# Altium PCB PCB4.PcbDoc (part 3 of 5)
Units mm, origin at the board's own origin, x right, y up, seen from the top; angles counter-clockwise.
Board outline 240 x 180 mm, 2 copper layers (Top Layer, Bottom Layer); 259 components, 311 nets, 1128 pads, 419 vias.
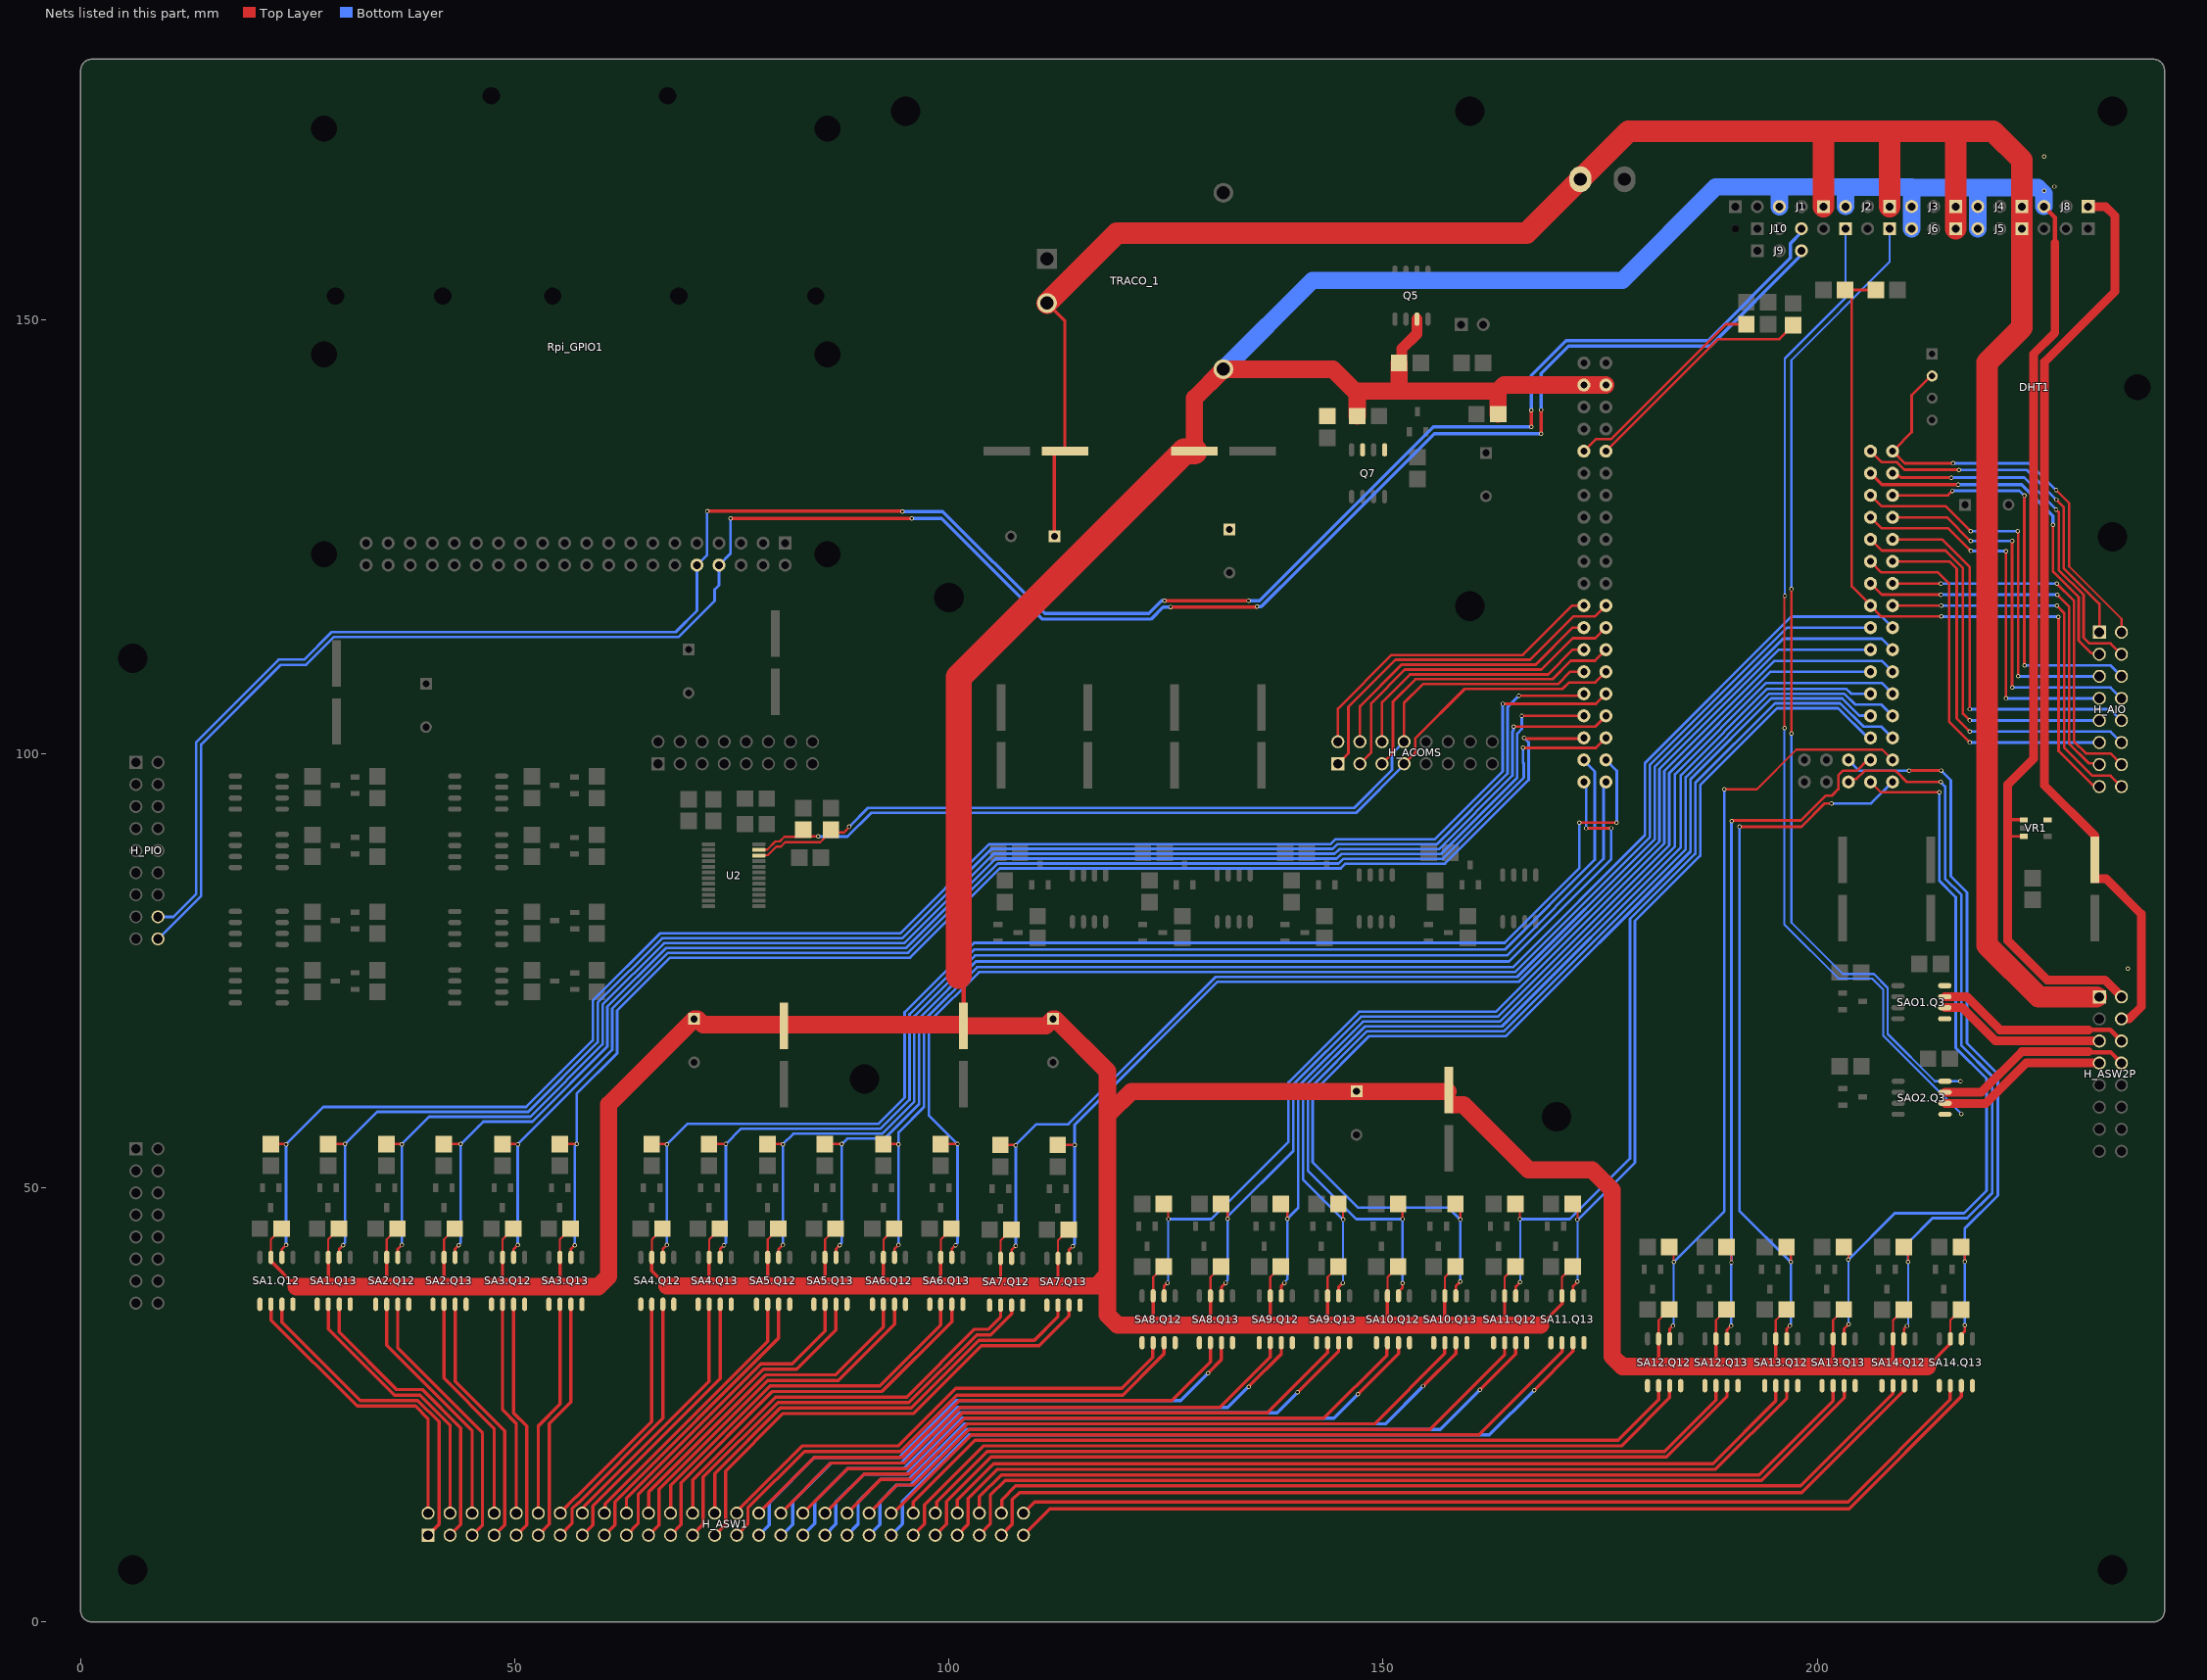
[diagram p2: the nets of this part, all layers, seen from the top]

## Via types
v1: diameter 0.5, hole 0.3, Top Layer to Bottom Layer, 387 vias
v2: diameter 0.5, hole 0.3, Top Layer to Bottom Layer, tented both sides, 24 vias
v3: diameter 1, hole 0.5, Top Layer to Bottom Layer, 8 vias

## Nets (pads, with @x,y where several pads share a name; then routed paths per layer and width w, separated by ;. In a path a pad name is that pad's centre, name@x,y a point inside that pad or via, vN(x,y) a via of type N, cw(c..) or ccw(c..) an arc to the next point about the centre after c; other vN are vias at no path point)
3.3V: C31.1 H_ASW2P.4 J8.1 VR1.5 | length 106.2
  Top Layer w1: J8.1@231.203,163.03 233.21,163.03 234.3,161.94 234.3,153.25 226.168,145.118 226.168,96.362 231.994,90.536 231.994,85.595 233.285,85.595 237.34,81.54 237.34,70.88 235.92,69.46 H_ASW2P.4@235.04,69.46
5V: C2.1 C3.1 C4.1 C5.1 C6.1 C7.1 C24.1 C25.1 H_ASW2P.2 J1.3 J2.3 J3.3 J4.3 J5.3 J6.3 J8.3 pad.VCC@1 pad.VCC@2 Q5.3 Q7.1 Q7.3 R1.2 R4.2 R16.2 R16U.2 SA1.Q12.3 SA1.Q13.3 SA1.R17.2 SA1.R18.2 SA2.Q12.3 SA2.Q13.3 SA2.R17.2 SA2.R18.2 SA3.Q12.3 SA3.Q13.3 SA3.R17.2 SA3.R18.2 SA4.Q12.3 SA4.Q13.3 SA4.R17.2 SA4.R18.2 SA5.Q12.3 SA5.Q13.3 SA5.R17.2 SA5.R18.2 SA6.Q12.3 SA6.Q13.3 SA6.R17.2 SA6.R18.2 SA7.Q12.3 SA7.Q13.3 SA7.R17.2 SA7.R18.2 SA8.Q12.3 SA8.Q13.3 SA8.R17.2 SA8.R18.2 SA9.Q12.3 SA9.Q13.3 SA9.R17.2 SA9.R18.2 SA10.Q12.3 SA10.Q13.3 SA10.R17.2 SA10.R18.2 SA11.Q12.3 SA11.Q13.3 SA11.R17.2 SA11.R18.2 SA12.Q12.3 SA12.Q13.3 SA12.R17.2 SA12.R18.2 SA13.Q12.3 SA13.Q13.3 SA13.R17.2 SA13.R18.2 SA14.Q12.3 SA14.Q13.3 SA14.R17.2 SA14.R18.2 TRACO_1.4 VR1.1 VR1.3 | length 948.6
  Top Layer w0.254: SA1.Q12.3@21.903,41.999 21.903,44.069 SA1.R17.2@23.133,45.299 ; SA1.Q13.3@28.507,41.999 28.507,44.069 SA1.R18.2@29.737,45.299 ; SA2.Q12.3@35.245,41.998 35.245,44.068 SA2.R17.2@36.475,45.298 ; SA2.Q13.3@41.849,41.998 41.849,44.068 SA2.R18.2@43.079,45.298 ; SA3.Q12.3@48.587,41.998 48.587,44.068 SA3.R17.2@49.817,45.298 ; SA3.Q13.3@55.191,41.998 55.191,44.068 SA3.R18.2@56.421,45.298 ; SA4.Q12.3@65.775,41.998 65.775,44.068 SA4.R17.2@67.005,45.298 ; SA4.Q13.3@72.379,41.998 72.379,44.068 SA4.R18.2@73.609,45.298 ; SA5.Q12.3@79.115,41.998 79.115,44.068 SA5.R17.2@80.345,45.298 ; SA5.Q13.3@85.719,41.998 85.719,44.068 SA5.R18.2@86.949,45.298 ; SA6.Q12.3@92.457,41.998 92.457,44.068 SA6.R17.2@93.687,45.298 ; SA6.Q13.3@99.061,41.998 99.061,44.068 SA6.R18.2@100.291,45.298 ; SA7.Q12.3@105.947,41.893 105.947,43.963 SA7.R17.2@107.177,45.193 ; SA7.Q13.3@112.55,41.893 112.55,43.963 SA7.R18.2@113.78,45.193 ; SA8.Q12.3@123.513,37.567 123.513,39.708 SA8.R17.2@124.743,40.938 ; SA8.Q13.3@130.116,37.567 130.116,39.708 SA8.R18.2@131.346,40.938 ; SA9.Q12.3@137.009,37.567 137.009,39.708 SA9.R17.2@138.239,40.938 ; SA9.Q13.3@143.612,37.567 143.612,39.708 SA9.R18.2@144.842,40.938 ; SA10.Q12.3@150.507,37.567 150.507,39.708 SA10.R17.2@151.737,40.938 ; SA10.Q13.3@157.11,37.567 157.11,39.708 SA10.R18.2@158.34,40.938 ; SA11.Q12.3@164.007,37.566 164.007,39.707 SA11.R17.2@165.237,40.937 ; SA11.Q13.3@170.61,37.566 170.61,39.707 SA11.R18.2@171.84,40.937 ; SA12.Q12.3@181.734,32.617 181.734,34.758 SA12.R17.2@182.964,35.988 ; SA12.Q13.3@188.337,32.617 188.337,34.758 SA12.R18.2@189.567,35.988 ; SA13.Q12.3@195.232,32.617 195.232,34.758 SA13.R17.2@196.462,35.988 ; SA13.Q13.3@201.835,32.617 201.835,34.758 SA13.R18.2@203.065,35.988 ; SA14.Q12.3@208.73,32.615 208.73,34.757 SA14.R17.2@209.96,35.987 ; SA14.Q13.3@215.333,32.615 215.333,34.757 SA14.R18.2@216.563,35.987
  Top Layer w0.305: 221.93,90.47 221.95,90.49 VR1.3@223.795,90.49
  Top Layer w0.381: SA1.Q12.3@21.903,41.999 21.903,41.553 24.829,38.628 ; 28.487,38.628 28.507,38.648 SA1.Q13.3@28.507,41.999 ; 35.179,38.627 35.245,38.694 SA2.Q12.3@35.245,41.998 ; 41.829,38.627 41.849,38.647 SA2.Q13.3@41.849,41.998 ; 48.567,38.627 48.587,38.647 SA3.Q12.3@48.587,41.998 ; 55.171,38.627 55.191,38.647 SA3.Q13.3@55.191,41.998 ; SA4.Q12.3@65.775,41.998 65.775,40.433 67.516,38.693 ; 72.379,38.693 SA4.Q13.3@72.379,41.998 ; 79.115,38.693 SA5.Q12.3@79.115,41.998 ; 85.719,38.693 SA5.Q13.3@85.719,41.998 ; 92.457,38.693 SA6.Q12.3@92.457,41.998 ; 99.061,38.693 SA6.Q13.3@99.061,41.998 ; 105.947,38.693 SA7.Q12.3@105.947,41.893 ; 112.55,38.693 SA7.Q13.3@112.55,41.893 ; 123.513,34.196 SA8.Q12.3@123.513,37.567 ; 130.116,34.196 SA8.Q13.3@130.116,37.567 ; 137.009,34.196 SA9.Q12.3@137.009,37.567 ; 143.612,34.196 SA9.Q13.3@143.612,37.567 ; 150.507,34.196 SA10.Q12.3@150.507,37.567 ; 157.11,34.196 SA10.Q13.3@157.11,37.567 ; 164.007,34.196 SA11.Q12.3@164.007,37.566 ; 168.145,34.196 170.61,36.661 SA11.Q13.3@170.61,37.566 ; 181.734,29.415 SA12.Q12.3@181.734,32.617 ; 188.337,29.415 SA12.Q13.3@188.337,32.617 ; 195.232,29.415 SA13.Q12.3@195.232,32.617 ; 201.835,29.415 SA13.Q13.3@201.835,32.617 ; 208.73,29.415 SA14.Q12.3@208.73,32.615 ; 212.689,29.415 215.333,32.06 SA14.Q13.3@215.333,32.615 ; 221.93,92.39 VR1.1@223.795,92.39
  Top Layer w0.5: J8.3@226.123,163.03 227.382,161.771 227.382,158.862
  Top Layer w0.508: 101.116,74.445 101.684,73.878 C5.1@101.684,68.662
  Top Layer w0.635: C3.1@157.446,61.11 C3.1@157.586,61.25
  Top Layer w1: 227.382,158.862 227.382,148.502 224.914,146.034 224.914,99.414 221.93,96.43 221.93,92.39 221.93,90.47 221.93,78.512 226.489,73.953 233.127,73.953 235.034,72.045 H_ASW2P.2@235.034,72
  Top Layer w1.27: R16U.2@151.854,145.01 152.169,145.325 152.169,146.644 153.901,148.376 Q5.3@153.901,150.066
  Top Layer w2: 24.829,38.628 28.487,38.628 31.69,38.628 ; 31.691,38.627 35.179,38.627 41.829,38.627 48.567,38.627 55.171,38.627 59.623,38.627 60.794,39.799 60.794,59.594 C6.1@70.654,69.454 71.049,69.454 71.714,68.789 C7.1@80.487,68.789 ; 67.516,38.693 72.379,38.693 79.115,38.693 85.719,38.693 92.457,38.693 99.061,38.693 105.947,38.693 112.55,38.693 116.979,38.693 118.256,39.97 ; C7.1@80.987,68.662 81.114,68.789 101.557,68.789 C5.1@101.684,68.662 111.186,68.662 111.971,69.448 C4.1@111.971,69.454 112.234,69.454 118.256,63.432 118.256,58.557 ; C25.1@128.264,134.848 128.264,140.94 TRACO_1.4@131.614,144.29 144.236,144.29 147.03,141.496 ; R16.2@147.03,138.897 147.03,141.778 151.772,141.778 ; R16U.2@151.854,145.01 151.854,141.86 151.772,141.778 ; C3.1@157.446,61.11 C2.1@146.942,61.11 121.011,61.11 118.457,58.557 118.256,58.557 ; C3.1@158.086,59.575 159.261,59.575 166.772,52.064 174.076,52.064 176.384,49.756 176.384,30.587 177.556,29.415 181.734,29.415 188.337,29.415 195.232,29.415 201.835,29.415 208.73,29.415 212.689,29.415 ; R1.2@163.25,139.11 163.25,141.778 ; 168.145,34.196 164.007,34.196 157.11,34.196 150.507,34.196 143.612,34.196 137.009,34.196 130.116,34.196 123.513,34.196 119.428,34.196 118.256,35.368 118.256,39.97 ; 175.666,142.47 163.942,142.47 163.25,141.778 ; 118.256,39.97 118.256,58.557 ; 151.772,141.778 160.996,141.778 163.25,141.778
  Top Layer w3: 101.116,74.445 101.116,108.816 127.148,134.848 C25.1@128.264,134.848
  Bottom Layer w2: TRACO_1.4@131.614,144.29 141.854,154.53 177.556,154.53 188.31,165.284 195.643,165.284 ; J1.3@195.643,163.02 195.643,165.284 ; J2.3@203.263,163.03 203.263,165.247 ; 203.263,165.259 210.883,165.259 210.883,165.22 ; 203.263,165.284 195.643,165.284 ; J6.3@210.883,160.48 J3.3@210.883,163.03 210.883,165.22 ; J5.3@218.503,160.48 J4.3@218.503,163.03 218.503,165.22 ; J8.3@226.123,163.03 226.123,164.517 225.42,165.22 218.503,165.22 ; 210.883,165.22 218.503,165.22
  other v1: 235.79,75.25 226.14,164.85 227.33,165.32 226.151,168.797
5V12V_HS_1: H_ASW2P.5 SAO1.Q3.5 SAO1.Q3.6 | length 19.4
  Top Layer w1: SAO1.Q3.6@214.7,70.753 214.716,70.769 216.698,70.769 220.523,66.944 232.476,66.944 H_ASW2P.5@232.5,66.92
5V12V_HS_2: H_ASW2P.7 J11.1 SAO2.Q3.5 SAO2.Q3.6 | length 135.2
  Top Layer w0.254: v1(196.225,102.962) 196.225,118.129 v1(196.268,118.172)
  Top Layer w1: SAO2.Q3.6@214.776,59.727 219.422,59.727 224.075,64.38 H_ASW2P.7@232.5,64.38
  Bottom Layer w0.254: v1(196.225,102.962) 196.225,80.333 202.442,74.117 206.315,74.117 207.605,72.827 207.605,67.521 v1(216.597,58.529) ; v1(196.268,118.172) 196.268,145.51 203.263,152.506 J11.1@203.263,160.48
5V12V_LS_1: H_ASW2P.6 SAO1.Q3.7 SAO1.Q3.8 | length 22.5
  Top Layer w0.5: 231.23,68.198 233.762,68.198 H_ASW2P.6@235.04,66.92
  Top Layer w1: SAO1.Q3.7@214.7,72.023 217.217,72.023 221.042,68.198 231.23,68.198
5V12V_LS_2: H_ASW2P.8 J12.1 SAO2.Q3.7 SAO2.Q3.8 | length 137.6
  Top Layer w0.254: v1(197.024,102.319) v1(197.024,118.96)
  Top Layer w0.5: 231.23,65.69 231.286,65.634 233.786,65.634 H_ASW2P.8@235.04,64.38
  Top Layer w1: SAO2.Q3.7@214.714,60.998 218.884,60.998 223.575,65.69 231.23,65.69
  Bottom Layer w0.254: v1(197.024,102.319) 197.024,80.561 202.96,74.625 206.526,74.625 208.113,73.038 208.113,67.731 213.558,62.286 v1(216.517,62.286) ; v1(197.024,118.96) 197.024,145.332 208.343,156.652 J12.1@208.343,160.48
5V_HS_1: H_ASW1.2 SA1.Q12.5 SA1.Q12.6 | length 35.5
  Top Layer w0.381: SA1.Q12.6@21.903,36.599 21.938,36.564 21.938,34.767 31.837,24.868 38.556,24.868 40,23.424 H_ASW1.2@40,12.54
5V_HS_2: H_ASW1.4 SA1.Q13.5 SA1.Q13.6 | length 31.6
  Top Layer w0.381: SA1.Q13.6@28.507,36.599 28.516,36.589 28.516,33.746 36.124,26.138 39.082,26.138 42.54,22.68 H_ASW1.4@42.54,12.54
5V_HS_3: H_ASW1.6 SA2.Q12.5 SA2.Q12.6 | length 28.1
  Top Layer w0.381: SA2.Q12.6@35.245,36.598 35.245,31.882 45.08,22.048 H_ASW1.6@45.08,12.54
5V_HS_4: H_ASW1.8 SA2.Q13.5 SA2.Q13.6 | length 26.4
  Top Layer w0.381: SA2.Q13.6@41.849,36.598 41.849,28.081 47.62,22.31 H_ASW1.8@47.62,12.54
5V_HS_5: H_ASW1.10 SA3.Q12.5 SA3.Q12.6 | length 24.7
  Top Layer w0.381: SA3.Q12.6@48.587,36.598 48.587,24.438 50.16,22.865 H_ASW1.10@50.16,12.54
5V_HS_6: H_ASW1.12 SA3.Q13.5 SA3.Q13.6 | length 25.1
  Top Layer w0.381: H_ASW1.12@52.7,12.54 52.7,22.595 55.191,25.086 SA3.Q13.6@55.191,36.598
5V_HS_7: H_ASW1.14 SA4.Q12.5 SA4.Q12.6 | length 28.4
  Top Layer w0.381: H_ASW1.14@55.24,12.54 55.24,12.587 57.022,14.369 57.069,14.369 65.775,23.075 SA4.Q12.6@65.775,36.598
5V_HS_8: H_ASW1.16 SA4.Q13.5 SA4.Q13.6 | length 30.1
  Top Layer w0.381: H_ASW1.16@57.78,12.54 57.994,12.754 57.994,13.298 72.379,27.683 SA4.Q13.6@72.379,36.598
5V_HS_9: H_ASW1.18 SA5.Q12.5 SA5.Q12.6 | length 31.8
  Top Layer w0.381: H_ASW1.18@60.32,12.54 60.38,12.6 60.38,13.587 79.115,32.323 SA5.Q12.6@79.115,36.598
5V_HS_10: H_ASW1.20 SA5.Q13.5 SA5.Q13.6 | length 35.7
  Top Layer w0.381: H_ASW1.20@62.86,12.54 62.86,14.271 78.318,29.729 81.943,29.729 85.719,33.505 SA5.Q13.6@85.719,36.598
5V_HS_11: H_ASW1.22 SA6.Q12.5 SA6.Q12.6 | length 40
  Top Layer w0.381: H_ASW1.22@65.4,12.54 65.4,14.984 78.875,28.459 86.933,28.459 92.457,33.983 SA6.Q12.6@92.457,36.598
5V_HS_12: H_ASW1.24 SA6.Q13.5 SA6.Q13.6 | length 44.4
  Top Layer w0.381: H_ASW1.24@67.94,12.54 67.94,15.728 79.401,27.189 92.037,27.189 99.061,34.213 SA6.Q13.6@99.061,36.598
5V_HS_13: H_ASW1.26 SA7.Q12.5 SA7.Q12.6 | length 48.4
  Top Layer w0.381: H_ASW1.26@70.48,12.54 70.48,16.359 80.04,25.919 95.134,25.919 102.929,33.714 104.545,33.714 105.947,35.116 SA7.Q12.6@105.947,36.493
5V_HS_14: H_ASW1.28 SA7.Q13.5 SA7.Q13.6 | length 52.9
  Top Layer w0.381: H_ASW1.28@73.02,12.54 73.02,17.103 80.566,24.649 95.66,24.649 103.455,32.444 109.847,32.444 112.55,35.147 SA7.Q13.6@112.55,36.493
5V_HS_15: H_ASW1.30 SA8.Q12.5 SA8.Q12.6 | length 57.2
  Top Layer w0.381: H_ASW1.30@75.56,12.54 75.56,12.759 83.081,20.28 94.149,20.28 100.771,26.902 119.896,26.902 123.471,30.477 123.471,32.125 SA8.Q12.6@123.513,32.167
5V_HS_16: H_ASW1.32 SA8.Q13.5 SA8.Q13.6 | length 61.4
  Top Layer w0.305: H_ASW1.32@78.07,12.57 H_ASW1.32@78.1,12.54
  Top Layer w0.381: H_ASW1.32@78.13,12.57 84.51,18.95 94.615,18.95 101.171,25.506 125.646,25.506 130.116,29.976 SA8.Q13.6@130.116,32.167
5V_HS_17: H_ASW1.34 SA9.Q12.5 SA9.Q12.6 | length 65.5
  Top Layer w0.381: H_ASW1.34@80.64,12.54 86.415,18.315 94.878,18.315 101.288,24.725 131.191,24.725 137.009,30.543 SA9.Q12.6@137.009,32.167
5V_HS_18: H_ASW1.36 SA9.Q13.5 SA9.Q13.6 | length 69.2
  Top Layer w0.381: H_ASW1.36@83.18,12.54 88.32,17.68 95.141,17.68 101.551,24.09 136.675,24.09 143.612,31.027 SA9.Q13.6@143.612,32.167
5V_HS_19: H_ASW1.38 SA10.Q12.5 SA10.Q12.6 | length 73.7
  Top Layer w0.381: H_ASW1.38@85.72,12.54 90.225,17.045 95.405,17.045 101.814,23.455 143.182,23.455 150.435,30.708 150.435,31.466 150.465,31.495 150.465,32.125 SA10.Q12.6@150.507,32.167
5V_HS_20: H_ASW1.40 SA10.Q13.5 SA10.Q13.6 | length 77.7
  Top Layer w0.381: H_ASW1.40@88.26,12.54 92.13,16.41 95.668,16.41 102.077,22.82 142.533,22.82 149.036,22.82 157.11,30.894 SA10.Q13.6@157.11,32.167
5V_HS_21: H_ASW1.42 SA11.Q12.5 SA11.Q12.6 | length 82.1
  Top Layer w0.381: H_ASW1.42@90.8,12.54 94.035,15.775 95.931,15.775 102.34,22.185 142.796,22.185 155.407,22.185 164.007,30.785 SA11.Q12.6@164.007,32.166
5V_HS_22: H_ASW1.44 SA11.Q13.5 SA11.Q13.6 | length 86
  Top Layer w0.381: H_ASW1.44@93.34,12.54 93.593,12.54 102.603,21.55 143.059,21.55 161.026,21.55 170.61,31.134 SA11.Q13.6@170.61,32.166
5V_HS_23: H_ASW1.46 SA12.Q12.5 SA12.Q12.6 | length 93.6
  Top Layer w0.381: H_ASW1.46@95.88,12.54 95.88,13.817 102.978,20.915 177.047,20.915 181.734,25.602 SA12.Q12.6@181.734,27.217
5V_HS_24: H_ASW1.48 SA12.Q13.5 SA12.Q13.6 | length 97.6
  Top Layer w0.381: H_ASW1.48@98.42,12.54 98.61,12.73 98.61,13.848 104.407,19.645 182.403,19.645 188.337,25.579 SA12.Q13.6@188.337,27.217
5V_HS_25: H_ASW1.50 SA13.Q12.5 SA13.Q12.6 | length 102.3
  Top Layer w0.381: H_ASW1.50@100.96,12.54 100.969,12.549 100.969,14.052 105.151,18.234 187.99,18.234 195.232,25.476 SA13.Q12.6@195.232,27.217
5V_HS_26: H_ASW1.52 SA13.Q13.5 SA13.Q13.6 | length 106.7
  Top Layer w0.381: H_ASW1.52@103.5,12.54 103.5,14.428 106.021,16.949 193.311,16.949 201.832,25.47 201.832,27.214 SA13.Q13.6@201.835,27.217
  Bottom Layer w0.305: H_ASW1.52@103.5,12.54 H_ASW1.52@103.5,12.73
5V_HS_27: H_ASW1.54 SA14.Q12.5 SA14.Q12.6 | length 110.2
  Top Layer w0.381: H_ASW1.54@106.04,12.54 106.082,12.582 106.082,14.068 107.692,15.679 198.106,15.679 208.713,26.287 208.713,27.198 SA14.Q12.6@208.73,27.215
5V_HS_28: H_ASW1.56 SA14.Q13.5 SA14.Q13.6 | length 113.8
  Top Layer w0.381: H_ASW1.56@108.58,12.54 109.884,13.844 203.568,13.844 215.316,25.592 215.316,27.198 SA14.Q13.6@215.333,27.215
5V_LS_1: H_ASW1.1 SA1.Q12.7 SA1.Q12.8 | length 38.5
  Top Layer w0.381: SA1.Q12.7@23.173,36.599 23.173,34.537 32.207,25.503 38.819,25.503 41.258,23.064 41.258,11.258 H_ASW1.1@40,10
5V_LS_2: H_ASW1.3 SA1.Q13.7 SA1.Q13.8 | length 34.6
  Top Layer w0.381: SA1.Q13.7@29.777,36.599 29.777,33.383 36.387,26.773 39.345,26.773 43.77,22.348 43.77,11.23 H_ASW1.3@42.54,10
5V_LS_3: H_ASW1.5 SA2.Q12.7 SA2.Q12.8 | length 31.1
  Top Layer w0.381: SA2.Q12.7@36.515,36.598 36.515,31.516 46.274,21.757 46.274,11.194 H_ASW1.5@45.08,10
5V_LS_4: H_ASW1.7 SA2.Q13.7 SA2.Q13.8 | length 29.5
  Top Layer w0.381: SA2.Q13.7@43.119,36.598 43.119,27.709 48.814,22.013 48.814,11.194 H_ASW1.7@47.62,10
5V_LS_5: H_ASW1.9 SA3.Q12.7 SA3.Q12.8 | length 27.7
  Top Layer w0.381: SA3.Q12.7@49.857,36.598 49.857,24.066 51.354,22.569 51.354,11.194 H_ASW1.9@50.16,10
5V_LS_6: H_ASW1.11 SA3.Q13.7 SA3.Q13.8 | length 28.2
  Top Layer w0.381: H_ASW1.11@52.7,10 53.962,11.262 53.962,22.836 56.461,25.335 SA3.Q13.7@56.461,36.598
5V_LS_7: H_ASW1.13 SA4.Q12.7 SA4.Q12.8 | length 31.5
  Top Layer w0.381: H_ASW1.13@55.24,10 56.585,11.345 56.585,13.035 57.285,13.734 57.333,13.734 67.045,23.447 SA4.Q12.7@67.045,36.598
5V_LS_8: H_ASW1.15 SA4.Q13.7 SA4.Q13.8 | length 33.2
  Top Layer w0.381: H_ASW1.15@57.78,10 58.974,11.194 58.974,13.38 73.649,28.055 SA4.Q13.7@73.649,36.598
5V_LS_9: H_ASW1.17 SA5.Q12.7 SA5.Q12.8 | length 34.9
  Top Layer w0.381: H_ASW1.17@60.32,10 61.514,11.194 61.514,13.824 80.385,32.695 SA5.Q12.7@80.385,36.598
5V_LS_10: H_ASW1.19 SA5.Q13.7 SA5.Q13.8 | length 38.8
  Top Layer w0.381: H_ASW1.19@62.86,10 64.205,11.345 64.205,14.687 78.612,29.094 82.44,29.094 86.989,33.643 SA5.Q13.7@86.989,36.598
5V_LS_11: H_ASW1.21 SA6.Q12.7 SA6.Q12.8 | length 43.1
  Top Layer w0.381: H_ASW1.21@65.4,10 66.594,11.194 66.594,15.28 79.138,27.824 87.248,27.824 93.727,34.303 SA6.Q12.7@93.727,36.598
5V_LS_12: H_ASW1.23 SA6.Q13.7 SA6.Q13.8 | length 47.4
  Top Layer w0.381: H_ASW1.23@67.94,10 69.16,11.22 69.16,16.05 79.664,26.554 92.3,26.554 100.331,34.585 SA6.Q13.7@100.331,36.598
5V_LS_13: H_ASW1.25 SA7.Q12.7 SA7.Q12.8 | length 51.5
  Top Layer w0.381: H_ASW1.25@70.48,10 70.48,10.038 71.701,11.259 71.701,16.683 80.303,25.284 95.397,25.284 103.192,33.079 104.808,33.079 107.217,35.488 SA7.Q12.7@107.217,36.493
5V_LS_14: H_ASW1.27 SA7.Q13.7 SA7.Q13.8 | length 56.1
  Top Layer w0.381: H_ASW1.27@73.02,10 74.262,11.242 74.262,17.383 80.893,24.014 95.923,24.014 103.718,31.809 110.375,31.809 113.82,35.254 SA7.Q13.7@113.82,36.493
5V_LS_15: H_ASW1.29 SA8.Q12.7 SA8.Q12.8 | length 60.2
  Top Layer w0.381: H_ASW1.29@75.56,10 76.842,11.282 76.842,13.143 83.344,19.645 94.412,19.645 100.908,26.141 120.033,26.141 124.106,30.214 124.783,30.891 SA8.Q12.7@124.783,32.167
5V_LS_16: H_ASW1.31 SA8.Q13.7 SA8.Q13.8 | length 65.1
  Top Layer w0.381: v1(129.849,28.678) 131.386,30.215 SA8.Q13.7@131.386,32.167
  Bottom Layer w0.381: H_ASW1.31@78.1,10 79.294,11.194 79.294,13.734 84.506,18.946 94.296,18.946 100.856,25.506 126.677,25.506 v1(129.849,28.678)
5V_LS_17: H_ASW1.33 SA9.Q12.7 SA9.Q12.8 | length 69.2
  Top Layer w0.381: v1(134.544,27.096) 134.544,27.146 138.279,30.881 SA9.Q12.7@138.279,32.167
  Bottom Layer w0.381: H_ASW1.33@80.64,10 80.77,10 81.985,11.215 81.985,13.885 86.411,18.311 94.559,18.311 100.973,24.725 132.123,24.725 134.477,27.079 134.527,27.079 v1(134.544,27.096)
5V_LS_18: H_ASW1.35 SA9.Q13.7 SA9.Q13.8 | length 72.9
  Top Layer w0.381: v1(140.144,26.454) 144.882,31.192 SA9.Q13.7@144.882,32.167
  Bottom Layer w0.381: H_ASW1.35@83.18,10 84.525,11.345 84.525,13.885 88.316,17.676 94.83,17.676 101.244,24.09 137.78,24.09 v1(140.144,26.454)
5V_LS_19: H_ASW1.37 SA10.Q12.7 SA10.Q12.8 | length 77.5
  Top Layer w0.381: v1(147.121,26.245) 151.777,30.901 SA10.Q12.7@151.777,32.167
  Bottom Layer w0.381: H_ASW1.37@85.72,10 86.989,11.269 86.989,13.809 90.221,17.041 95.093,17.041 101.507,23.455 101.599,23.455 144.331,23.455 v1(147.121,26.245)
5V_LS_20: H_ASW1.39 SA10.Q13.7 SA10.Q13.8 | length 81.5
  Top Layer w0.381: v1(154.609,27.167) 158.38,30.938 SA10.Q13.7@158.38,32.167
  Bottom Layer w0.381: H_ASW1.39@88.26,10 89.536,11.276 89.536,13.816 92.126,16.406 95.356,16.406 101.77,22.82 101.862,22.82 150.262,22.82 v1(154.609,27.167)
5V_LS_21: H_ASW1.41 SA11.Q12.7 SA11.Q12.8 | length 85.9
  Top Layer w0.381: v1(161.166,26.742) 165.277,30.853 SA11.Q12.7@165.277,32.166
  Bottom Layer w0.381: H_ASW1.41@90.8,10 92.048,11.248 92.048,13.834 93.985,15.771 95.619,15.771 102.033,22.185 156.609,22.185 v1(161.166,26.742)
5V_LS_22: H_ASW1.43 SA11.Q13.7 SA11.Q13.8 | length 89.8
  Top Layer w0.381: v1(167.397,26.706) 171.88,31.189 SA11.Q13.7@171.88,32.166
  Bottom Layer w0.381: H_ASW1.43@93.34,10 94.652,11.312 94.652,13.906 102.296,21.55 162.241,21.55 v1(167.397,26.706)
5V_LS_23: H_ASW1.45 SA12.Q12.7 SA12.Q12.8 | length 96.3
  Top Layer w0.381: H_ASW1.45@95.88,10 97.162,11.282 97.162,13.478 102.517,18.833 103.964,20.28 177.437,20.28 183.004,25.847 SA12.Q12.7@183.004,27.217
5V_LS_24: H_ASW1.47 SA12.Q13.7 SA12.Q13.8 | length 100.6
  Top Layer w0.381: H_ASW1.47@98.42,10 99.702,11.282 99.702,13.863 104.843,19.004 182.66,19.004 189.607,25.951 SA12.Q13.7@189.607,27.217
5V_LS_25: H_ASW1.49 SA13.Q12.7 SA13.Q12.8 | length 105.2
  Top Layer w0.381: H_ASW1.49@100.96,10 102.218,11.258 102.218,14.223 105.579,17.584 188.3,17.584 196.502,25.786 SA13.Q12.7@196.502,27.217
5V_LS_26: H_ASW1.51 SA13.Q13.7 SA13.Q13.8 | length 109.5
  Top Layer w0.381: H_ASW1.51@103.5,10 104.766,11.266 104.766,14.616 106.464,16.314 193.574,16.314 203.105,25.845 SA13.Q13.7@203.105,27.217
5V_LS_27: H_ASW1.53 SA14.Q12.7 SA14.Q12.8 | length 113.1
  Top Layer w0.381: H_ASW1.53@106.04,10 107.298,11.258 107.298,14.112 108.103,14.917 198.242,14.917 209.891,26.566 209.891,26.572 210,26.681 SA14.Q12.7@210,27.215
5V_LS_28: H_ASW1.55 SA14.Q13.7 SA14.Q13.8 | length 115.9
  Top Layer w0.381: H_ASW1.55@108.58,10 111.627,13.047 203.669,13.047 216.603,25.981 SA14.Q13.7@216.603,27.215
5V_SW1: pad.D22 SA1.Q12.2 SA1.R12.1 | length 195.9
  Top Layer w0.305: SA1.R12.1@21.781,55.049 SA1.R12.1@21.883,55.049 23.621,55.049 v1(23.652,55.017) ; SA1.Q12.2@23.173,41.999 23.173,42.944 v1(23.652,43.423) ; v1(163.79,105.754) 174.51,105.754 pad.D22@175.666,106.91
  Bottom Layer w0.305: v1(23.652,43.423) v1(23.652,55.017) 27.95,59.315 51.311,59.315 58.984,66.987 58.984,71.573 66.716,79.306 94.369,79.306 104.664,89.601 143.961,89.601 144.498,90.137 155.959,90.137 163.778,97.957 v1@163.778,105.832
5V_SW2: pad.D23 SA1.Q13.2 SA1.R11.1 | length 186.6
  Top Layer w0.305: SA1.R11.1@28.487,55.049 v1(30.433,55.049) ; SA1.Q13.2@29.777,41.999 29.777,42.965 v1(30.209,43.397) ; v1(165.636,106.681) 172.897,106.681 pad.D23@173.126,106.91
  Bottom Layer w0.305: v1(30.209,43.397) 30.209,43.449 30.433,43.673 v1(30.433,55.049) 34.14,58.756 51.543,58.756 59.543,66.756 59.543,71.342 66.948,78.747 94.615,78.747 104.91,89.042 144.193,89.042 144.729,89.578 156.19,89.578 164.337,97.725 164.337,105.383 v1(165.636,106.681)
5V_SW3: pad.D24 SA2.Q12.2 SA2.R12.1 | length 180.1
  Top Layer w0.305: SA2.R12.1@35.123,55.048 SA2.R12.1@35.225,55.048 36.963,55.048 v1(36.994,55.017) ; SA2.Q12.2@36.515,41.998 36.515,42.943 v1(36.994,43.422) ; v1(165.061,103.116) 174.412,103.116 pad.D24@175.666,104.37
  Bottom Layer w0.305: v1@36.963,55.048 40.112,58.197 51.774,58.197 60.101,66.524 60.101,71.11 67.179,78.188 94.846,78.188 105.141,88.484 144.424,88.484 144.96,89.02 156.422,89.02 164.896,97.494 164.896,102.564 165.024,102.692 165.024,103.079 v1(165.061,103.116) ; v1(36.994,43.422) v1(36.994,55.017)
5V_SW4: pad.D25 SA2.Q13.2 SA2.R11.1 | length 171.6
  Top Layer w0.305: SA2.R11.1@41.829,55.048 v1(43.775,55.048) ; SA2.Q13.2@43.119,41.998 43.119,42.965 v1(43.551,43.397) ; v1(165.977,104.37) pad.D25@173.126,104.37
  Bottom Layer w0.305: v1(43.551,43.397) 43.551,43.449 43.775,43.673 v1(43.775,55.048) 45.806,57.08 46.365,57.638 52.006,57.638 60.66,66.293 60.66,70.879 67.411,77.63 95.078,77.63 105.373,87.925 144.656,87.925 145.192,88.461 156.653,88.461 165.455,97.262 165.455,102.332 165.977,102.854 v1(165.977,104.37)
5V_SW5: pad.D26 SA3.Q12.2 SA3.R12.1 | length 164.8
  Top Layer w0.305: SA3.R12.1@48.465,55.048 SA3.R12.1@48.567,55.048 50.305,55.048 v1(50.336,55.017) ; SA3.Q12.2@49.857,41.998 49.857,42.943 v1(50.336,43.422) ; v1(166.111,100.7) 166.214,100.7 166.24,100.674 174.51,100.674 pad.D26@175.666,101.83
  Bottom Layer w0.305: v1(50.336,43.422) v1(50.336,55.017) 61.219,65.9 61.219,70.647 67.642,77.071 95.309,77.071 105.604,87.366 144.887,87.366 145.423,87.902 156.885,87.902 166.209,97.226 166.209,98.888 166.111,98.986 v1(166.111,100.7)
5V_SW6: pad.D27 SA3.Q13.2 SA3.R11.1 | length 160.5
  Top Layer w0.305: SA3.R11.1@55.171,55.048 v1(57.117,55.048) ; SA3.Q13.2@56.461,41.998 56.461,42.965 v1(56.893,43.397) ; v1(166.254,101.83) 166.307,101.83 166.381,101.756 173.052,101.756 pad.D27@173.126,101.83
  Bottom Layer w0.305: v1(56.893,43.397) 56.893,54.771 57.117,54.995 v1(57.117,55.048) 57.117,60.839 61.778,65.5 61.778,70.416 67.874,76.512 95.541,76.512 105.836,86.807 145.119,86.807 145.655,87.343 157.116,87.343 166.768,96.995 166.768,101.317 v1(166.254,101.83)
5V_SW7: pad.D28 SA4.Q12.2 SA4.R12.1 | length 156.4
  Top Layer w0.305: SA4.R12.1@65.653,55.048 SA4.R12.1@65.755,55.048 67.493,55.048 v1(67.524,55.017) ; SA4.Q12.2@67.045,41.998 67.045,42.943 v1(67.524,43.422) ; v1(172.62,92.084) v1(176.891,92.084)
  Bottom Layer w0.305: v1(67.524,43.422) v1(67.524,55.017) 69.893,57.386 91.892,57.386 94.891,60.386 94.891,70.229 102.893,78.23 164.021,78.23 172.62,86.829 v1(172.62,92.084) ; pad.D28@175.666,99.29 176.911,98.045 176.911,92.104 v1(176.891,92.084)
5V_SW8: pad.D29 SA4.Q13.2 SA4.R11.1 | length 146.7
  Top Layer w0.305: SA4.R11.1@72.359,55.048 v1(74.305,55.048) ; SA4.Q13.2@73.649,41.998 73.649,42.965 v1(74.081,43.397)
  Bottom Layer w0.305: v1(74.081,43.397) 74.081,43.449 74.305,43.673 v1(74.305,55.048) 76.016,56.76 76.054,56.798 92.094,56.798 95.45,60.154 95.45,69.997 102.903,77.45 164.031,77.45 174.374,87.793 174.374,97.961 173.126,99.21 pad.D29@173.126,99.29
5V_SW9: pad.D30 SA5.Q12.2 SA5.R12.1 | length 138
  Top Layer w0.305: SA5.R12.1@78.993,55.048 SA5.R12.1@79.095,55.048 80.833,55.048 v1(80.864,55.017) ; SA5.Q12.2@80.385,41.998 80.385,42.943 v1(80.864,43.422)
  Bottom Layer w0.305: v1(80.864,43.422) v1(80.864,55.017) 82.086,56.239 92.325,56.239 96.009,59.923 96.009,69.766 103.013,76.77 164.264,76.77 175.394,87.9 175.394,96.478 pad.D30@175.666,96.75
5V_SW10: pad.D31 SA5.Q13.2 SA5.R11.1 | length 135.2
  Top Layer w0.305: SA5.R11.1@85.699,55.048 v1(87.645,55.048) ; SA5.Q13.2@86.989,41.998 86.989,42.965 v1(87.421,43.397) ; v1(173.388,91.42) v1(176.288,91.42)
  Bottom Layer w0.305: v1(87.421,43.397) 87.421,43.449 87.645,43.673 v1(87.645,55.048) 88.277,55.68 92.557,55.68 96.568,59.691 96.568,69.534 103.104,76.07 164.492,76.07 176.288,87.866 v1(176.288,91.42) ; pad.D31@173.126,96.75 173.072,96.696 173.388,96.381 v1(173.388,91.42)
5V_SW11: pad.D32 SA6.Q12.2 SA6.R12.1 | length 166.8
  Top Layer w0.305: SA6.R12.1@92.335,55.048 SA6.R12.1@92.437,55.048 94.175,55.048 v1(94.206,55.017) ; SA6.Q12.2@93.727,41.998 93.727,42.943 v1(94.206,43.422)
  Bottom Layer w0.305: v1(94.206,43.422) v1(94.206,55.017) 94.206,56.412 97.127,59.332 97.127,69.303 103.242,75.419 164.973,75.419 180.162,90.608 180.162,98.928 197.024,115.79 207.426,115.79 pad.D32@208.686,114.53
5V_SW12: pad.D33 SA6.Q13.2 SA6.R11.1 | length 162.8
  Top Layer w0.305: SA6.R11.1@99.041,55.048 v1(100.987,55.048) ; SA6.Q13.2@100.331,41.998 100.331,42.965 v1(100.763,43.397)
  Bottom Layer w0.305: v1(100.763,43.397) 100.763,43.449 100.987,43.673 v1(100.987,55.048) 97.685,58.35 97.685,69.071 103.474,74.86 165.206,74.86 180.721,90.374 180.721,98.697 196.554,114.53 pad.D33@206.146,114.53
5V_SW13: pad.D34 SA7.Q12.2 SA7.R12.1 | length 145.7
  Top Layer w0.305: SA7.R12.1@105.825,54.943 SA7.R12.1@105.927,54.943 107.664,54.943 v1(107.696,54.912) ; SA7.Q12.2@107.217,41.893 107.217,42.838 v1(107.696,43.317)
  Bottom Layer w0.305: v1@107.664,54.943 110.049,57.328 113.75,57.328 130.723,74.301 165.437,74.301 181.279,90.143 181.279,98.465 196.074,113.26 207.416,113.26 pad.D34@208.686,111.99 ; v1(107.696,43.317) v1(107.696,54.912)
5V_SW14: pad.D35 SA7.Q13.2 SA7.R11.1 | length 136.8
  Top Layer w0.305: SA7.R11.1@112.53,54.943 v1(114.476,54.943) ; SA7.Q13.2@113.82,41.893 113.82,42.859 v1(114.252,43.292)
  Bottom Layer w0.305: v1(114.252,43.292) 114.252,43.344 114.476,43.568 v1(114.476,54.943) 114.476,57.264 130.954,73.742 165.669,73.742 181.838,89.911 181.838,98.234 195.594,111.99 pad.D35@206.146,111.99
5V_SW15: pad.D36 SA8.Q12.2 SA8.R12.1 | length 130.4
  Top Layer w0.254: SA8.R12.1@124.743,48.138 125.257,47.624 v1(125.257,46.404)
  Top Layer w0.305: SA8.Q12.2@124.783,37.567 124.783,38.702 v1(125.143,39.062)
  Bottom Layer w0.254: v1(125.143,39.062) 125.143,39.129 125.257,39.243 v1(125.257,46.404)
  Bottom Layer w0.305: v1(125.257,46.404) 130.213,46.404 139.104,55.295 139.104,62.14 147.244,70.28 162.997,70.28 182.397,89.68 182.397,98.002 195.089,110.695 207.441,110.695 pad.D36@208.686,109.45
5V_SW16: pad.D37 SA8.Q13.2 SA8.R11.1 | length 120.6
  Top Layer w0.254: SA8.R11.1@131.386,48.098 132.091,47.393 v1(132.091,46.443)
  Top Layer w0.305: SA8.R11.1@131.346,48.138 SA8.R11.1@131.386,48.098 ; SA8.Q13.2@131.386,37.567 131.386,38.587 131.55,38.751 v1(131.861,39.062)
  Bottom Layer w0.254: v1(131.861,39.062) 131.861,39.129 132.091,39.359 v1(132.091,46.443)
  Bottom Layer w0.305: v1@132.091,46.688 139.663,54.26 139.663,61.909 147.475,69.721 163.228,69.721 182.956,89.449 182.956,97.771 194.635,109.45 pad.D37@206.146,109.45
5V_SW17: pad.D38 SA9.Q12.2 SA9.R12.1 | length 120
  Top Layer w0.254: SA9.R12.1@138.239,48.138 138.984,47.393 v1(138.984,46.443)
  Top Layer w0.305: SA9.Q12.2@138.279,37.567 138.279,38.702 v1(138.639,39.062)
  Bottom Layer w0.254: v1(138.639,39.062) 138.639,39.129 138.984,39.474 v1(138.984,46.443)
  Bottom Layer w0.305: v1(138.984,46.443) 140.222,47.681 140.222,61.677 147.707,69.162 163.46,69.162 183.62,89.322 183.62,97.645 194.13,108.155 207.441,108.155 pad.D38@208.686,106.91
5V_SW18: pad.D39 SA9.Q13.2 SA9.R11.1 | length 117.6
  Top Layer w0.254: SA9.R11.1@144.882,48.098 145.396,47.584 v1(145.396,46.352)
  Top Layer w0.305: SA9.R11.1@144.842,48.138 SA9.R11.1@144.882,48.098 ; SA9.Q13.2@144.882,37.567 144.882,38.587 145.046,38.751 v1(145.357,39.062)
  Bottom Layer w0.254: v1(145.357,39.062) 145.376,39.082 145.376,46.333 v1(145.396,46.352)
  Bottom Layer w0.305: v1(145.396,46.352) 140.78,50.968 140.78,61.446 147.938,68.604 163.691,68.604 184.295,89.207 184.295,97.529 194.248,107.482 203.345,107.482 203.918,106.91 pad.D39@206.146,106.91
5V_SW19: pad.D40 SA10.Q12.2 SA10.R12.1 | length 125.6
  Top Layer w0.254: SA10.R12.1@151.737,48.138 152.251,47.624 v1(152.251,46.404)
  Top Layer w0.305: SA10.Q12.2@151.777,37.567 151.777,38.045 152.251,38.519 v1(152.251,39.032)
  Bottom Layer w0.254: v1(152.251,39.032) v1(152.251,46.404)
  Bottom Layer w0.305: v1(152.251,46.404) 146.925,46.404 141.339,51.99 141.339,61.215 148.169,68.045 163.923,68.045 184.854,88.976 184.854,97.298 194.479,106.923 203.114,106.923 204.372,105.665 207.391,105.665 pad.D40@208.686,104.37
5V_SW20: pad.D41 SA10.Q13.2 SA10.R11.1 | length 127.5
  Top Layer w0.254: SA10.R11.1@158.38,48.098 158.894,47.584 v1(158.894,46.352)
  Top Layer w0.305: SA10.R11.1@158.34,48.138 SA10.R11.1@158.38,48.098 ; SA10.Q13.2@158.38,37.567 158.38,38.685 v1(158.894,39.199)
  Bottom Layer w0.254: v1(158.894,39.199) v1(158.894,46.352)
  Bottom Layer w0.305: v1(158.894,46.352) 157.519,47.727 147.128,47.727 141.898,52.957 141.898,60.983 148.401,67.486 164.154,67.486 185.412,88.744 185.412,97.066 194.711,106.365 202.882,106.365 204.851,104.396 206.12,104.396 pad.D41@206.146,104.37
5V_SW21: pad.D42 SA11.Q12.2 SA11.R12.1 | length 101.1
  Top Layer w0.254: SA11.R12.1@165.237,48.137 165.751,47.623 v1(165.751,46.403)
  Top Layer w0.305: SA11.Q12.2@165.277,37.566 165.277,38.644 v1(165.797,39.164)
  Bottom Layer w0.254: v1(165.751,46.403) 165.797,46.357 v1(165.797,39.164)
  Bottom Layer w0.305: v1(165.751,46.403) 171.48,46.403 178.455,53.378 178.455,80.983 185.971,88.499 185.971,96.64 195.137,105.806 202.651,105.806 205.331,103.125 207.391,103.125 pad.D42@208.686,101.83
5V_SW22: pad.D43 SA11.Q13.2 SA11.R11.1 | length 91.4
  Top Layer w0.254: SA11.R11.1@171.88,48.097 172.394,47.583 v1(172.394,46.351)
  Top Layer w0.305: SA11.R11.1@171.84,48.137 SA11.R11.1@171.88,48.097 ; SA11.Q13.2@171.88,37.566 171.88,38.685 v1(172.394,39.199)
  Bottom Layer w0.254: v1(172.394,39.199) v1(172.394,46.351)
  Bottom Layer w0.305: v1@172.565,46.46 179.014,52.909 179.014,80.751 186.53,88.268 186.53,96.409 195.368,105.247 202.42,105.247 205.837,101.83 pad.D43@206.146,101.83
5V_SW23: pad.D44 SA12.Q12.2 SA12.R12.1 | length 89.6
  Top Layer w0.254: SA12.R12.1@182.964,43.188 183.478,42.674 v1(183.478,41.454) ; v1(189.298,95.912) 193.043,95.912 197.603,100.472 207.504,100.472 pad.D44@208.686,99.29
  Top Layer w0.305: SA12.Q12.2@183.004,32.617 183.004,33.752 v1(183.364,34.112)
  Bottom Layer w0.254: v1(183.364,34.112) 183.364,34.179 183.478,34.293 v1(183.478,41.454)
  Bottom Layer w0.305: v1(183.478,41.454) 189.298,47.274 v1(189.298,95.912)
5V_SW24: pad.D45 SA12.Q13.2 SA12.R11.1 | length 81.7
  Top Layer w0.254: SA12.R11.1@189.607,43.148 190.121,42.634 v1(190.121,41.402)
  Top Layer w0.305: SA12.R11.1@189.567,43.188 SA12.R11.1@189.607,43.148 ; SA12.Q13.2@189.607,32.617 189.607,33.637 189.77,33.801 v1(190.082,34.112) ; v1(190.142,92.228) 190.229,92.314 198.119,92.314 200.986,95.181 201.711,95.181 202.442,95.912 202.442,97.537 202.971,98.066 204.599,98.066 205.823,99.29 pad.D45@206.146,99.29
  Bottom Layer w0.254: v1(190.082,34.112) 190.101,34.132 190.101,41.383 v1(190.121,41.402)
  Bottom Layer w0.305: v1(190.121,41.402) 190.121,92.206 v1(190.142,92.228)
5V_SW25: pad.D46 SA13.Q12.2 SA13.R12.1 | length 83.4
  Top Layer w0.254: SA13.R12.1@196.462,43.188 196.976,42.674 v1(196.976,41.454)
  Top Layer w0.305: v1(191.042,91.596) 198.191,91.596 200.87,94.275 v1(201.634,94.275) ; SA13.Q12.2@196.502,32.617 196.502,33.752 v1(196.862,34.112)
  Bottom Layer w0.254: v1(196.862,34.112) 196.862,34.179 196.976,34.293 v1(196.976,41.454)
  Bottom Layer w0.305: v1(191.042,91.596) 191.042,47.388 v1(196.976,41.454) ; v1(201.634,94.275) 206.211,94.275 pad.D46@208.686,96.75
5V_SW26: pad.D47 SA13.Q13.2 SA13.R11.1 | length 86.8
  Top Layer w0.254: SA13.R11.1@203.065,43.188 203.594,42.659 v1(203.594,41.738) ; pad.D47@206.146,96.75 207.337,95.559 v1(214.084,95.559)
  Top Layer w0.305: SA13.Q13.2@203.105,32.617 203.105,33.771 v1(203.627,34.293)
  Bottom Layer w0.254: v1(203.594,41.738) 203.611,41.722 203.611,34.309 v1(203.627,34.293)
  Bottom Layer w0.305: v1(203.594,41.738) 208.935,47.079 216.912,47.079 219.502,49.67 219.502,62.576 215.957,66.121 215.957,83.483 214.085,85.355 v1@214.085,95.558
5V_SW27: pad.D48 SA14.Q12.2 SA14.R12.1 | length 86.8
  Top Layer w0.254: SA14.R12.1@209.96,43.187 210.474,42.673 v1(210.474,41.453)
  Top Layer w0.305: pad.D48@203.606,96.75 203.929,96.75 204.275,97.096 204.517,97.096 205.466,98.045 209,98.045 209.139,97.906 209.165,97.906 210.321,96.75 v1(214.225,96.75) ; SA14.Q12.2@210,32.615 210,33.75 v1(210.36,34.11)
  Bottom Layer w0.254: v1(210.36,34.11) 210.36,34.177 210.474,34.291 v1(210.474,41.453)
  Bottom Layer w0.305: v1(210.474,41.453) 210.474,43.718 213.277,46.521 217.281,46.521 220.158,49.398 220.158,62.848 216.613,66.393 216.613,83.754 214.74,85.627 214.74,96.235 v1(214.225,96.75)
5V_SW28: pad.D49 SA14.Q13.2 SA14.R11.1 | length 83
  Top Layer w0.305: v1(210.592,98.066) 210.6,98.074 v1(214.27,98.074) ; SA14.R11.1@216.563,43.187 217.003,42.747 v1(217.003,41.502) ; SA14.Q13.2@216.603,32.615 216.603,33.09 217.003,33.49 v1(217.003,34.177)
  Bottom Layer w0.305: pad.D49@203.606,99.29 204.851,98.045 210.571,98.045 v1(210.592,98.066) ; v1(214.27,98.074) 215.391,96.953 215.391,85.896 217.264,84.024 217.264,66.662 220.809,63.118 220.809,49.128 217.003,45.322 v1(217.003,41.502) v1(217.003,34.177)
12V: C22.1 C23.1 H_ASW2P.1 J1.1 J2.1 J3.1 J4.1 J5.1 J6.1 P1.2 TRACO_1.3 | length 286.6
  Top Layer w0.381: TRACO_1.3@111.294,151.91 113.35,149.854 C22.1@113.35,134.848 112.449,134.848 112.139,134.539 C23.1@112.139,125.037
  Top Layer w2.4: 225.521,71.999 H_ASW2P.1@232.17,71.999
  Top Layer w2.5: TRACO_1.3@111.294,151.91 119.344,159.96 166.516,159.96 178.266,171.71 200.544,171.71 ; J1.1@200.723,163.02 200.723,171.53 200.544,171.71 ; J2.1@208.343,163.03 208.343,171.59 208.464,171.71 ; J6.1@215.963,160.48 J3.1@215.963,163.03 215.963,171.59 215.844,171.71 ; 225.521,71.999 219.58,77.94 219.58,145.08 223.583,149.083 J5.1@223.583,160.48 J4.1@223.583,163.03 223.583,168.387 220.26,171.71 215.844,171.71 ; 200.544,171.71 208.464,171.71 ; 208.464,171.71 215.844,171.71
"A-RX <> P-TX": H_PIO.18 J9.3 Rpi_GPIO1.8 | length 250.3
  Top Layer w0.381: v1(74.84,127.1) v1(95.73,127.1) ; v1(125.531,116.913) 135.462,116.913 v1(135.484,116.935) ; v1(168.21,136.85) v1(168.21,139.598)
  Bottom Layer w0.305: H_PIO.18@8.89,78.68 8.923,78.68 13.864,83.621 13.864,101.06 23.054,110.25 25.956,110.25 29.144,113.438 68.828,113.438 73,117.61 73,118.91 73.51,119.42 Rpi_GPIO1.8@73.51,121.73 74.84,123.06 v1(74.84,127.1)
  Bottom Layer w0.381: v1(95.73,127.1) 99.18,127.1 110.773,115.507 123.271,115.507 124.678,116.913 v1(125.531,116.913) ; v1(135.484,116.935) 135.966,116.935 140.74,121.71 155.88,136.85 v1(168.21,136.85) ; v1(168.21,139.598) 168.21,143.807 171.365,146.962 187.696,146.962 198.183,157.449 J9.3@198.183,157.497
"A-TX <> P-RX": H_PIO.16 J10.3 Rpi_GPIO1.10 | length 252.4
  Top Layer w0.381: v1(72.166,127.928) 94.628,127.928 v1(94.653,127.904) ; v1(124.811,117.608) v1(134.502,117.608) ; v1(167.06,137.64) v1(167.06,139.584)
  Bottom Layer w0.305: H_PIO.16@8.89,81.22 10.673,81.22 13.305,83.852 13.305,101.335 22.81,110.84 25.726,110.84 28.904,114.018 68.525,114.018 70.97,116.463 Rpi_GPIO1.10@70.97,121.73 72.15,122.91 v1@72.15,127.928
  Bottom Layer w0.381: v1(94.653,127.904) 99.275,127.904 111.036,116.142 123.008,116.142 124.474,117.608 v1(124.811,117.608) ; v1(134.502,117.608) 134.524,117.63 135.762,117.63 155.772,137.64 v1(167.06,137.64) ; v1(167.06,139.584) 167.06,143.555 171.102,147.597 187.433,147.597 196.926,157.09 196.926,158.779 J10.3@198.183,160.037
A_RX0: pad.D0 R7.2 | length 27.6
  Top Layer w0.305: pad.D0@175.666,134.85 188.581,147.765 195.643,147.765 R7.2@197.237,149.36
A_RX1: H_ACOMS.6 pad.D19 | length 30.3
  Top Layer w0.305: H_ACOMS.6@149.88,101.39 149.88,105.93 153.095,109.145 168.999,109.145 171.844,111.99 pad.D19@173.126,111.99
A_RX2: H_ACOMS.4 pad.D17 | length 33.6
  Top Layer w0.305: H_ACOMS.4@147.34,101.39 147.34,105.476 152.127,110.263 167.587,110.263 171.854,114.53 pad.D17@173.126,114.53
A_RX3: H_ACOMS.2 pad.D15 | length 37
  Top Layer w0.305: H_ACOMS.2@144.8,101.39 144.8,105.186 150.994,111.38 166.104,111.38 171.794,117.07 pad.D15@173.126,117.07
A_TX0: pad.D1 R5.1 | length 24.8
  Top Layer w0.305: pad.D1@173.126,134.85 174.51,136.234 176.257,136.234 189.489,149.466 R5.1@191.844,149.466
A_TX1: H_ACOMS.5 pad.D18 | length 34.7
  Top Layer w0.305: H_ACOMS.5@149.88,98.85 149.987,98.957 151.134,100.104 151.134,106.004 153.716,108.586 169.5,108.586 171.638,110.724 174.4,110.724 pad.D18@175.666,111.99
A_TX2: H_ACOMS.3 pad.D16 | length 38.1
  Top Layer w0.305: H_ACOMS.3@147.34,98.85 148.634,100.144 148.634,105.824 152.514,109.704 168.218,109.704 171.834,113.32 174.424,113.32 175.634,114.53 pad.D16@175.666,114.53
A_TX3: H_ACOMS.1 pad.D14 | length 41.5
  Top Layer w0.305: H_ACOMS.1@144.8,98.85 146.004,100.054 146.004,105.39 151.435,110.821 166.935,110.821 171.924,115.81 174.406,115.81 pad.D14@175.666,117.07
AD0: DHT1.2 H_AIO.2 pad.A0/D54 | length 50.8
  Top Layer w0.254: v1(227.524,130.368) 229.007,128.885 229.007,121.563 235.04,115.53 H_AIO.2@235.04,114
  Top Layer w0.305: DHT1.2@213.234,143.51 213.082,143.51 210.883,141.312 210.883,137.047 208.883,135.047 pad.A0/D54@208.686,134.85 208.709,134.85 210.104,133.455 v1(215.646,133.455)
  Bottom Layer w0.305: v1(215.646,133.455) 224.423,133.455 227.51,130.368 v1(227.524,130.368)
AD1: H_AIO.1 pad.A1/D55 | length 41
  Top Layer w0.305: pad.A1/D55@206.146,134.85 207.419,133.577 209.188,133.577 210.047,132.718 216.315,132.718 v1(216.329,132.704) ; v1(227.539,129.276) 227.539,129.261 228.387,128.413 228.387,121.393 232.5,117.28 H_AIO.1@232.5,114
  Bottom Layer w0.305: v1(216.329,132.704) 224.111,132.704 v1(227.539,129.276)
AD2: H_AIO.4 pad.A2/D56 | length 42
  Top Layer w0.305: pad.A2/D56@208.686,132.31 209.168,131.828 209.401,132.061 209.659,131.804 v1(215.449,131.804) ; v1(227.524,128.135) 227.828,127.831 227.828,121.161 230.684,118.306 230.684,113.357 231.335,112.706 233.794,112.706 H_AIO.4@235.04,111.46
  Bottom Layer w0.305: v1(215.449,131.804) 223.855,131.804 v1(227.524,128.135)
AD3: H_AIO.3 pad.A3/D57 | length 41.7
  Top Layer w0.305: v1(227.172,126.353) 227.172,120.987 230.125,118.034 230.125,113.024 231.545,111.603 232.357,111.603 H_AIO.3@232.5,111.46
  Top Layer w0.381: pad.A3/D57@206.146,132.31 207.446,131.01 v1(216.24,131.01)
  Bottom Layer w0.381: v1(216.24,131.01) 223.562,131.01 227.172,127.4 v1(227.172,126.353)
AD4: H_AIO.6 pad.A4/D58 | length 46.9
  Top Layer w0.305: pad.A4/D58@208.686,129.77 215.044,129.77 v1(215.56,130.286) ; v1@223.86,110.18 v1(223.86,129.73)
  Bottom Layer w0.305: v1(215.56,130.286) 223.285,130.286 223.84,129.73 v1(223.86,129.73) ; v1(223.87,110.18) 233.78,110.18 H_AIO.6@235.04,108.92
AD5: H_AIO.5 pad.A5/D59 | length 44.7
  Top Layer w0.305: pad.A5/D59@206.146,129.77 207.416,128.5 214.81,128.5 v1(217.69,125.62) ; v1(223.144,108.92) v1@223.144,125.556
  Top Layer w0.381: v1(223.08,125.62) v1@223.144,125.556
  Bottom Layer w0.305: v1(217.69,125.62) v1(223.08,125.62) ; v1(223.144,108.92) H_AIO.5@232.5,108.92
AD6: H_AIO.8 pad.A6/D60 | length 44.9
  Top Layer w0.305: pad.A6/D60@208.686,127.23 214.93,127.23 v1(217.66,124.5) ; v1@222.45,107.63 v1(222.45,124.5)
  Bottom Layer w0.305: v1(217.66,124.5) v1(222.45,124.5) ; v1(222.46,107.63) 233.79,107.63 H_AIO.8@235.04,106.38
AD7: H_AIO.7 pad.A7/D61 | length 44.9
  Top Layer w0.305: pad.A7/D61@206.146,127.23 207.416,125.96 215.1,125.96 v1(217.7,123.36) ; v1(221.75,106.38) v1(221.75,123.33)
  Bottom Layer w0.305: v1(217.7,123.36) v1@221.76,123.36 ; v1@221.76,106.38 H_AIO.7@232.5,106.38
  Bottom Layer w0.381: v1(221.75,123.33) 221.75,123.35 v1@221.76,123.36
AD8: H_AIO.10 pad.A8/D62 | length 44.6
  Top Layer w0.305: pad.A8/D62@208.686,124.69 214.39,124.69 217.55,121.53 v1@217.55,105.13
  Bottom Layer w0.305: v1(217.58,105.13) 233.75,105.13 H_AIO.10@235.04,103.84
AD9: H_AIO.9 pad.A9/D63 | length 44.9
  Top Layer w0.305: pad.A9/D63@206.146,124.69 207.436,123.4 214.79,123.4 216.79,121.4 216.79,104.63 v1(217.58,103.84)
  Bottom Layer w0.305: v1(217.58,103.84) H_AIO.9@232.5,103.84 ; H_AIO.9@232.464,104.17 H_AIO.9@232.494,104.14
AD10: H_AIO.12 pad.A10/D64 | length 45.1
  Top Layer w0.305: pad.A10/D64@208.686,122.15 215.23,122.15 216.06,121.32 216.06,104.08 v1(217.58,102.56)
  Bottom Layer w0.305: v1(217.58,102.56) 233.78,102.56 H_AIO.12@235.04,101.3
AD11: H_AIO.11 pad.A11/D65 | length 44.3
  Top Layer w0.305: pad.A11/D65@206.146,122.15 207.406,120.89 213.91,120.89 215.18,119.62 215.18,103.7 v1(217.58,101.3)
  Bottom Layer w0.305: v1(217.58,101.3) H_AIO.11@232.5,101.3
AD12: H_AIO.14 pad.A12/D66 | length 44.3
  Top Layer w0.305: pad.A12/D66@208.686,119.61 208.696,119.6 v1@214.09,119.6 ; v1(227.6,119.6) 229.566,117.634 229.566,101.413 230.949,100.03 233.77,100.03 H_AIO.14@235.04,98.76
  Bottom Layer w0.305: v1(214.26,119.6) v1(227.6,119.6)
AD13: H_AIO.13 pad.A13/D67 | length 44.2
  Top Layer w0.305: pad.A13/D67@206.146,119.61 207.436,118.32 v1(214.26,118.32) ; v1(227.645,118.32) 229.007,116.957 229.007,101.182 231.293,98.896 232.364,98.896 H_AIO.13@232.5,98.76
  Bottom Layer w0.305: v1(214.26,118.32) v1(227.645,118.32)
AD14: H_AIO.16 pad.A14/D68 | length 44.1
  Top Layer w0.305: pad.A14/D68@208.686,117.07 v1(214.27,117.07) ; v1(227.593,117.07) 228.448,116.215 228.448,100.711 231.679,97.48 233.78,97.48 H_AIO.16@235.04,96.22
  Bottom Layer w0.305: v1(214.27,117.07) v1(227.593,117.07)
AD15: H_AIO.15 pad.A15/D69 R2.1 R3.2 | length 85.1
  Top Layer w0.305: R3.2@206.75,153.43 R2.1@203.223,153.43 203.98,152.674 203.98,119.298 206.146,117.131 pad.A15/D69@206.146,117.07 207.406,115.81 v1(214.3,115.81) ; v1(227.792,115.777) 227.811,115.758 227.811,100.312 231.674,96.449 232.271,96.449 H_AIO.15@232.5,96.22
  Bottom Layer w0.305: v1(214.3,115.81) 214.317,115.793 227.775,115.793 v1(227.792,115.777)
ard_scl_21: H_ACOMS.8 pad.D21 R24.2 U2.22 | length 107.7
  Top Layer w0.254: U2.22@78.101,88.319 79.138,88.319 80.126,89.306 80.638,89.306 81.132,89.8 85.152,89.8 85.579,90.227 85.579,90.427 86.089,90.937 87.929,90.937 88.192,91.2 88.192,91.213 88.509,91.53 v2(88.509,91.596)
  Top Layer w0.305: H_ACOMS.8@152.404,101.39 152.404,105.834 154.597,108.027 170.141,108.027 171.564,109.45 pad.D21@173.126,109.45
  Bottom Layer w0.305: v2(88.509,91.596) 90.673,93.76 146.658,93.76 151.036,98.138 151.036,100.006 H_ACOMS.8@152.42,101.39
ard_sda_20: H_ACOMS.7 pad.D20 R23.2 U2.23 | length 107
  Top Layer w0.254: U2.23@78.168,88.969 79.07,88.969 80.004,89.903 80.516,89.903 81.04,90.427 83.316,90.427 83.367,90.478 v2(84.938,90.478)
  Top Layer w0.305: H_ACOMS.7@152.42,98.85 153.69,100.12 153.69,101.755 159.403,107.469 170.683,107.469 171.434,108.22 174.436,108.22 pad.D20@175.666,109.45
  Bottom Layer w0.305: v2(84.938,90.478) 84.948,90.469 88.31,90.469 91.042,93.201 146.89,93.201 152.42,98.731 H_ACOMS.7@152.42,98.85